# Altium PCB PCB FrSky DJT Decoder DRAFT.pcbdoc
Units mm, origin at the board's own origin, x right, y up, seen from the top; angles counter-clockwise.
Board outline 78.51 x 60.52 mm, 2 copper layers (Top Layer, Bottom Layer); 7 components, 33 nets, 50 pads, 0 vias.
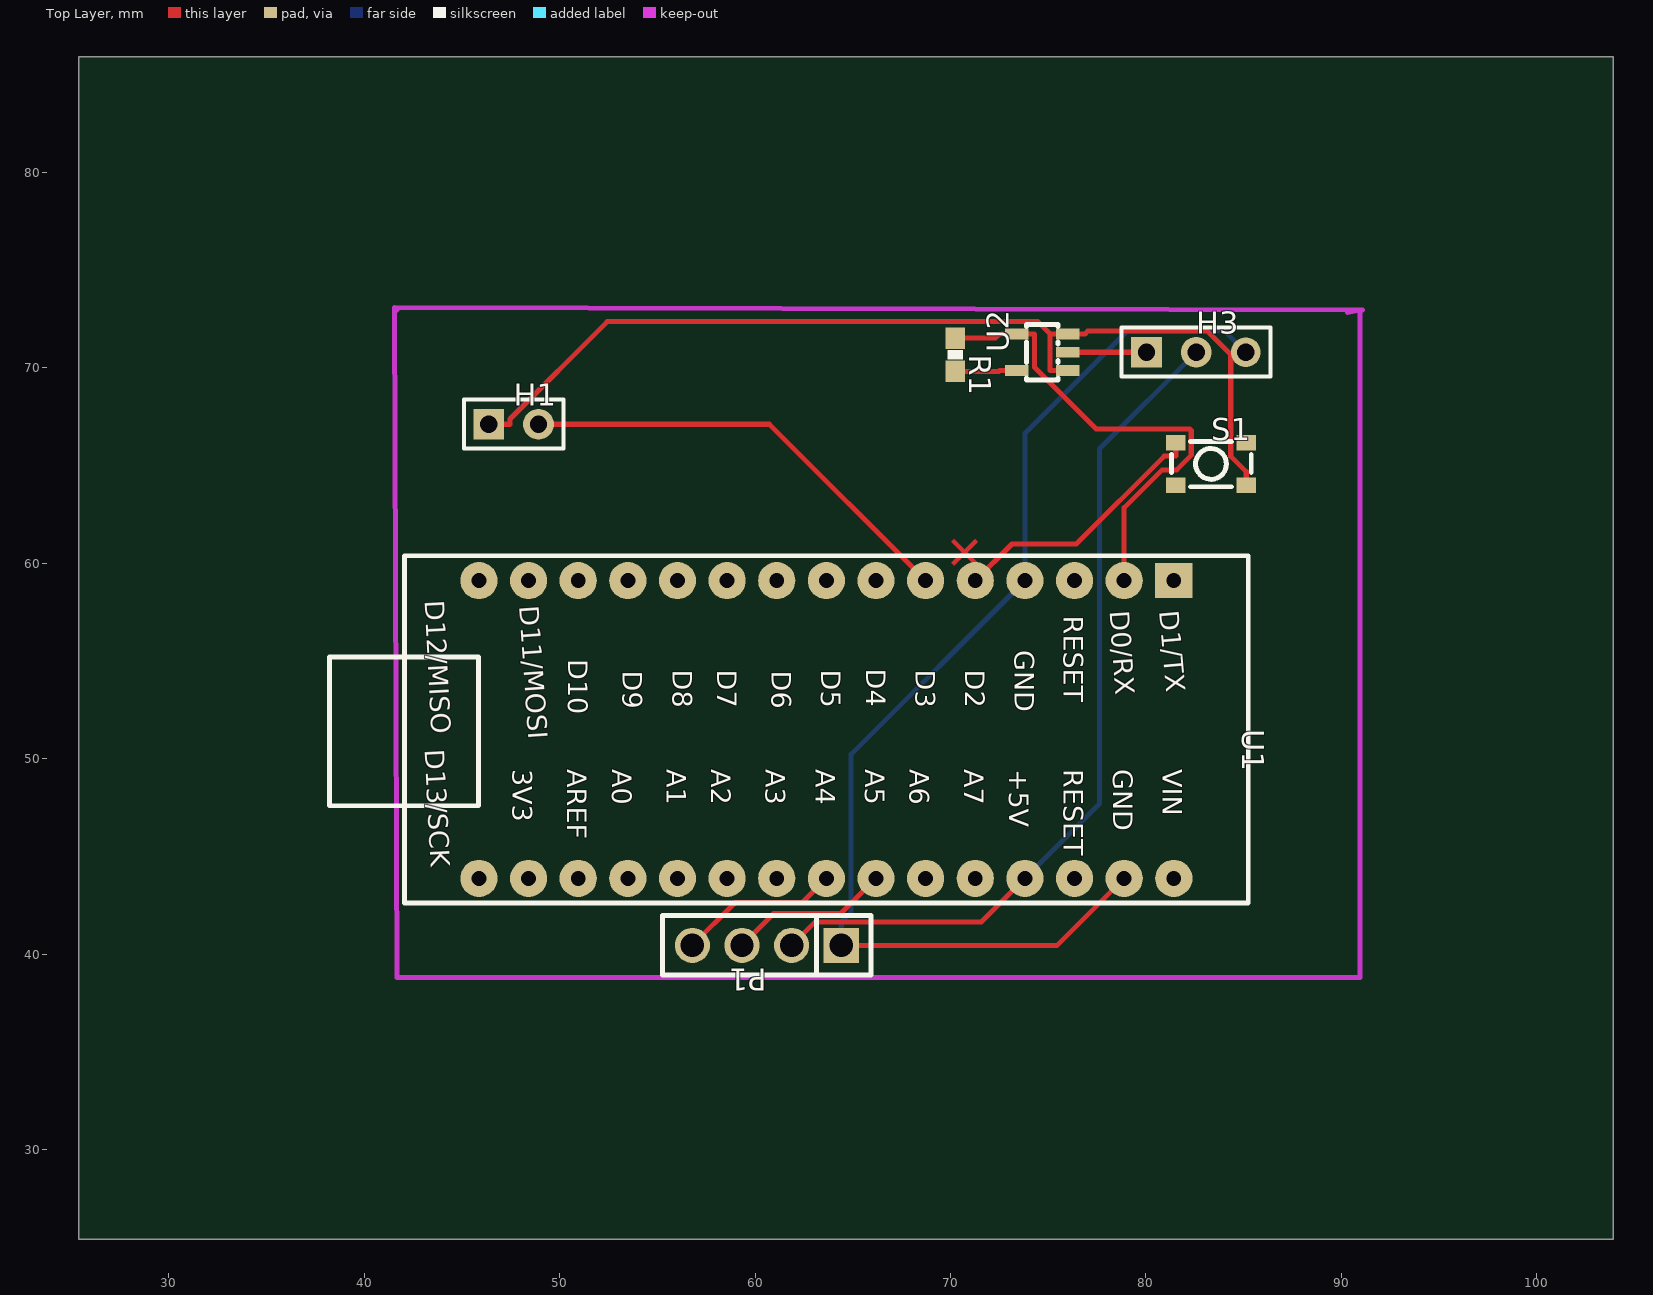
[diagram p0: Top Layer view]
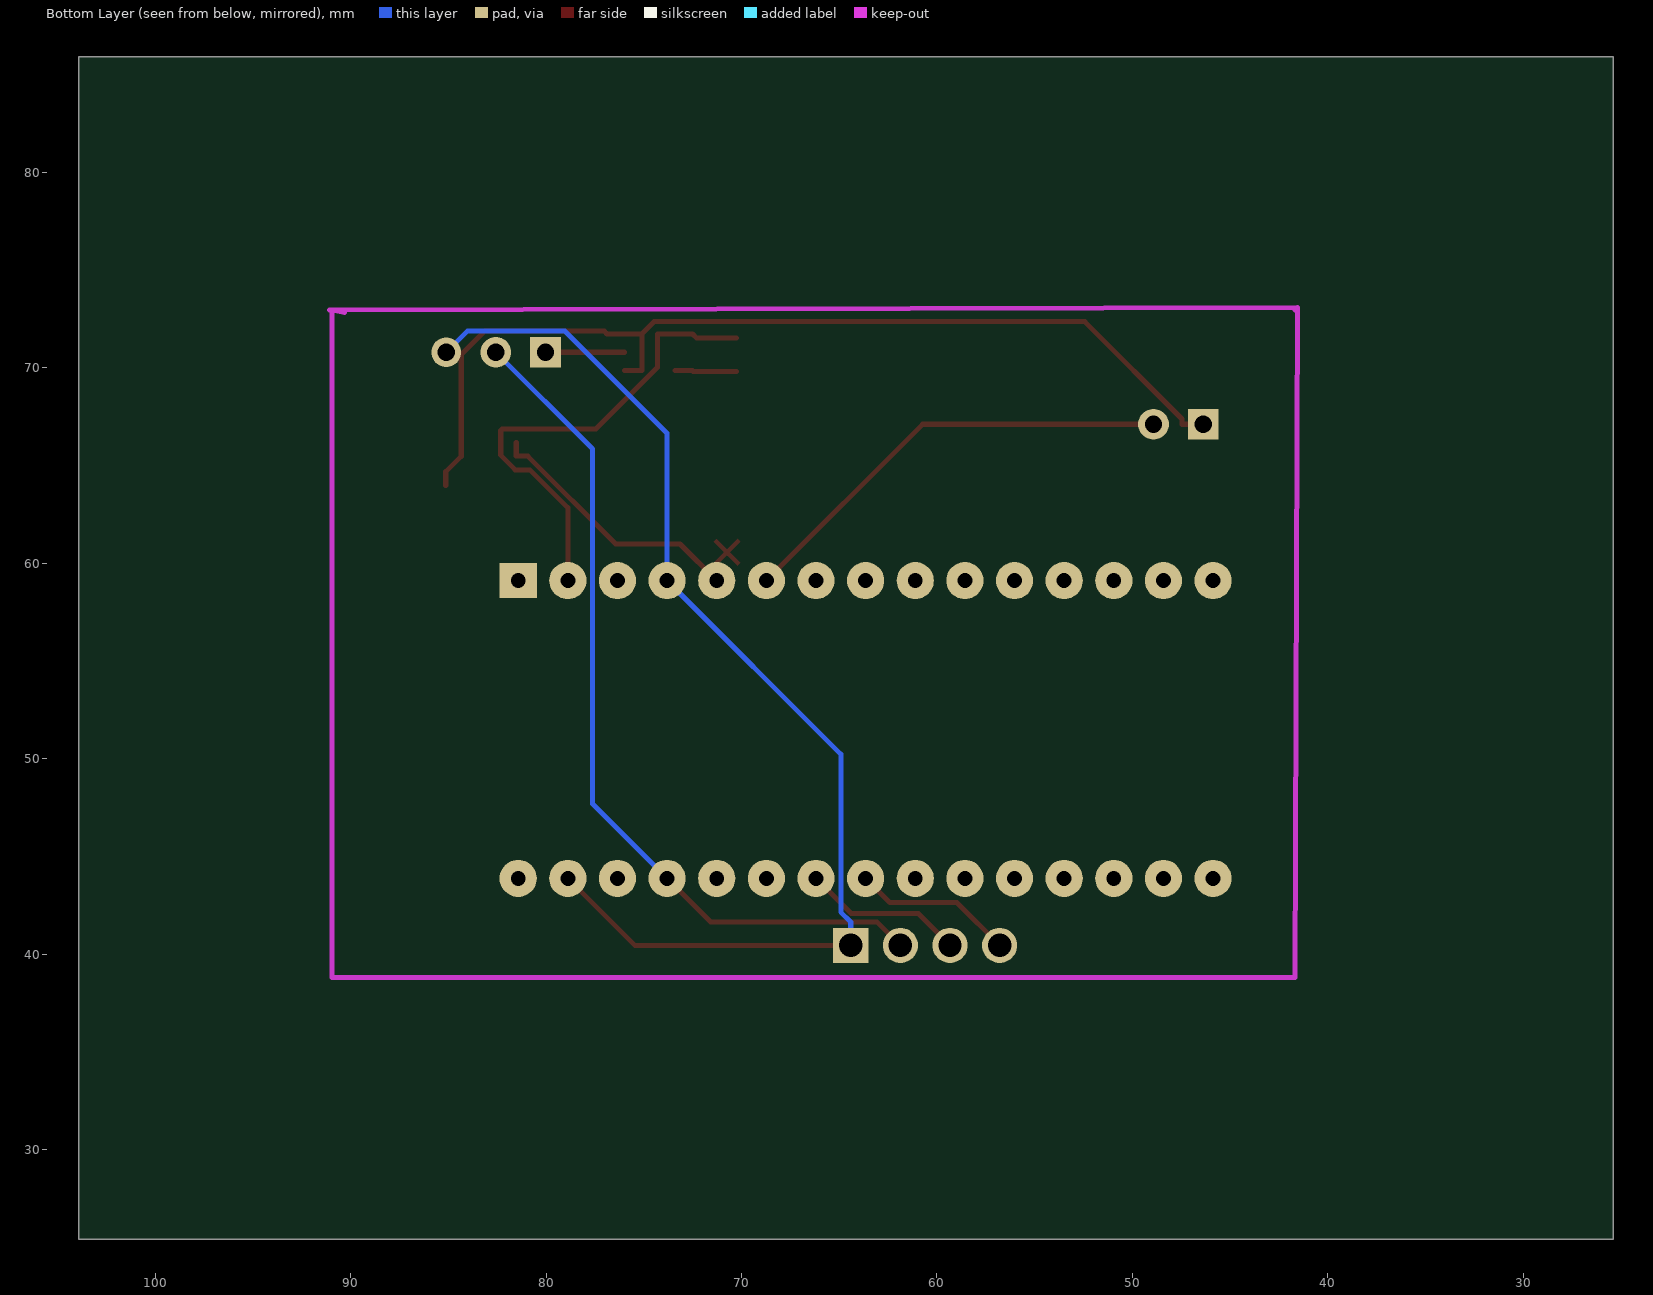
[diagram p1: Bottom Layer view, seen from below]

## Layer stack, top to bottom
Top Layer: signal copper (thickness not stored)
Dielectric: dielectric 0.32, FR-4, Dk 4.8
Bottom Layer: signal copper (thickness not stored)

## Board outline
103.909,25.4 25.4,25.4 25.4,85.915 103.909,85.915

## Components (designator, comment, footprint, x,y, rotation, side; value= is the part's Value field where it differs from the comment)
H1 "HDR-F-2.54_1x2" HDR-F-2.54_1X2 47.648,67.12 r0 top
H3 "HDR-F-2.54_1x3" HDR-F-2.54_1X3 82.573,70.802 r0 top
P1 "Header-Male-2.54_1x4" DIP-1X4P-2.54MM-M 60.602,40.45 r180 top
R1 "RESISTOR0603-RES" 0603-RES 70.254,70.675 r270 top
S1 "SWITCH-MOMENTARY-2SMD-3" TACTILE_SWITCH_SMD-3 83.335,65.087 r0 top
U1 "Arduino-NANO" ARDUINO-NANO3 63.65,51.498 r270 top
U2 "INVERTER_SOT23-5" SOT23-5 74.699,70.802 r90 top

## Footprints (in the part's own frame and the unit in brackets; to place one, negate y for a bottom-side part, rotate by r counter-clockwise, add the part's x,y. Pads: shape width x height; smd on the part's side, far side on the other; paste and mask are expansions set on the pad)
0603-RES [mm]
  rect 1.1x1 smd: 1(-0.85,0) 2(0.85,0)
  silkscreen extent -0.23,-0.38 0.23,0.38
ARDUINO-NANO3 [mil]
  rect 70x75 hole 30: 1(-300,700)
  round 75 hole 30: 2(-300,600) 3(-300,500) 4(-300,400) 5(-300,300) 6(-300,200) 7(-300,100) 8(-300,0) 9(-300,-100) 10(-300,-200) 11(-300,-300) 12(-300,-400) 13(-300,-500) 14(-300,-600) 15(-300,-700) 16(300,-700) 17(300,-600) 18(300,-500) 19(300,-400) 20(300,-300) 21(300,-200) 22(300,-100) 23(300,0) 24(300,100) 25(300,200) 26(300,300) 27(300,400) 28(300,500) 29(300,600) 30(300,700)
  silkscreen extent -350,-1001 350,850
DIP-1X4P-2.54MM-M [mm]
  rect 1.8x1.8 hole 1.2: 1(-3.81,0)
  round 1.8 hole 1.2: 2(-1.27,0) 3(1.27,0) 4(3.81,0)
  silkscreen extent -5.33,-1.52 5.33,1.52
HDR-F-2.54_1X2 [mil]
  rect 62x62 hole 35: 1(-50,0)
  round 62 hole 35: 2(50,0)
  silkscreen extent -100,-49 100,50
HDR-F-2.54_1X3 [mil]
  rect 62x62 hole 35: 1(-100,0)
  round 62 hole 35: 2(0,0)
  round 60 hole 36: 3(100,0)
  silkscreen extent -150,-49 150,50
SOT23-5 [mil]
  rect 21.7x47.2 smd: 1(-37,-51) 2(0,-51) 3(37,-51) 4(37,51) 5(-37,51)
  silkscreen extent -56,-32 56,32
TACTILE_SWITCH_SMD-3 [mil]
  rect 39.4x31.5 smd: 1(-71,43) 2(71,43) 3(-71,-43) 4(71,-43)
  silkscreen extent -80,-46 81,45

## Nets (pads, with @x,y where several pads share a name; then routed paths per layer and width w, separated by ;. In a path a pad name is that pad's centre, name@x,y a point inside that pad or via, vN(x,y) a via of type N, cw(c..) or ccw(c..) an arc to the next point about the centre after c; other vN are vias at no path point)
5V: R1.2 U2.5 | length 3.2
  Top Layer w0.26: R1.2 72.474,69.825 72.512,69.863 U2.5
+5V: H3.2 P1.2 U1.27 | length 43.9
  Top Layer w0.26: P1.2 63.076,41.653 71.585,41.653 U1.27
  Bottom Layer w0.26: U1.27 77.62,47.688 77.62,65.849 H3.2
BUZZER: H1.2 U1.6 | length 23.1
  Top Layer w0.26: H1.2 60.729,67.12 U1.6
GND: H1.1 H3.3 P1.1 S1.4 U1.4 U1.29 U2.1 U2.3 | length 111.6
  Top Layer w0.26: H1.1 47.457,67.12 47.457,67.389 52.436,72.367 74.478,72.367 75.103,71.742 ; P1.1 75.461,40.45 U1.29 ; U2.1 75.103,69.863 75.103,71.742 ; H3.3 84.458,70.802 84.346,70.691 ; S1.4 85.138,64.689 84.346,65.481 84.346,70.691 ; 75.103,71.742 75.209,71.742 U2.3 76.441,71.742 76.886,71.742 77.025,71.882 83.155,71.882 84.346,70.691
  Bottom Layer w0.26: P1.1 64.412,41.641 64.92,42.149 64.92,50.228 U1.4 73.81,66.662 79.03,71.882 84.033,71.882 H3.3
I2C_SCL: P1.3 U1.24 | length 8.3
  Top Layer w0.26: P1.3 60.957,42.075 64.386,42.075 U1.24
I2C_SDA: P1.4 U1.23 | length 8.3
  Top Layer w0.26: P1.4 58.976,42.634 62.405,42.634 U1.23
INVRX: R1.1 U1.2 U2.4 | length 24.7
  Top Layer w0.26: R1.1@70.254,71.524 72.293,71.524 72.512,71.742 U2.4 74.295,71.742 74.295,70.03 77.455,66.873 82.248,66.873 82.324,66.797 82.324,65.535 81.58,64.788 80.833,64.788 78.89,62.845 U1.2
RX: H3.1 U2.2 | length 4
  Top Layer w0.26: U2.2 H3.1
S$15: 
S$17: 
SCROLL: S1.1 U1.5 | length 13.6
  Top Layer w0.26: U1.5 73.147,60.996 76.441,60.996 80.935,65.486 81.531,65.486 S1.1
U1_1: U1.1
U1_3: U1.3
U1_7: U1.7
U1_8: U1.8
U1_9: U1.9
U1_10: U1.10
U1_11: U1.11
U1_12: U1.12
U1_13: U1.13
U1_14: U1.14
U1_15: U1.15
U1_16: U1.16
U1_17: U1.17
U1_18: U1.18
U1_19: U1.19
U1_20: U1.20
U1_21: U1.21
U1_22: U1.22
U1_25: U1.25
U1_26: U1.26
U1_28: U1.28
U1_30: U1.30
pads on no net: S1.2 S1.3

## Other copper
Top Layer:
  text "+" at 70.932,61.996 h2.03 r225

## Text inside footprints (layer, text, board x,y; h text height)
U1: Top Overlay "D1/TX" at 80.693,57.55 h1.02 r275; Top Overlay "GND" at 78.336,49.466 h1.02 r270; Top Overlay "+5V" at 73.002,49.466 h1.02 r270; Top Overlay "D12/MISO" at 43.099,58.076 h1.02 r273; Top Overlay "VIN" at 80.876,49.466 h1.02 r270; Top Overlay "D13/SCK" at 43.099,50.456 h1.02 r273; Top Overlay "GND" at 73.302,55.555 h1.02 r270; Top Overlay "D0/RX" at 78.152,57.559 h1.02 r274; Top Overlay "RESET" at 75.796,57.318 h1.02 r270; Top Overlay "D2" at 70.762,54.557 h1.02 r270; Top Overlay "D3" at 68.222,54.557 h1.02 r270; Top Overlay "D4" at 65.682,54.602 h1.02 r270; Top Overlay "D5" at 63.396,54.557 h1.02 r270; Top Overlay "D6" at 60.856,54.511 h1.02 r270; Top Overlay "D7" at 58.062,54.557 h1.02 r270; Top Overlay "D8" at 55.776,54.557 h1.02 r270; Top Overlay "D9" at 53.236,54.511 h1.02 r270; Top Overlay "D10" at 50.442,55.093 h1.02 r270; Top Overlay "D11/MOSI" at 47.926,57.813 h1.02 r274; Top Overlay "3V3" at 47.602,49.466 h1.02 r270; Top Overlay "AREF" at 50.396,49.466 h1.02 r270; Top Overlay "A0" at 52.682,49.466 h1.02 r270; Top Overlay "A1" at 55.476,49.466 h1.02 r270; Top Overlay "A2" at 57.762,49.466 h1.02 r270; Top Overlay "A3" at 60.556,49.466 h1.02 r270; Top Overlay "A4" at 63.096,49.466 h1.02 r270; Top Overlay "A5" at 65.636,49.466 h1.02 r270; Top Overlay "A6" at 67.922,49.466 h1.02 r270; Top Overlay "A7" at 70.716,49.466 h1.02 r270; Top Overlay "RESET" at 75.796,49.466 h1.02 r270